# Altium PCB Presgo.PcbDoc
Units mm, origin at the board's own origin, x right, y up, seen from the top; angles counter-clockwise.
Board outline 35 x 25 mm, 4 copper layers (Top Layer, GND1, GND2, Bottom Layer), stack 0.672 mm thick; 38 components, 29 nets, 144 pads, 70 vias.
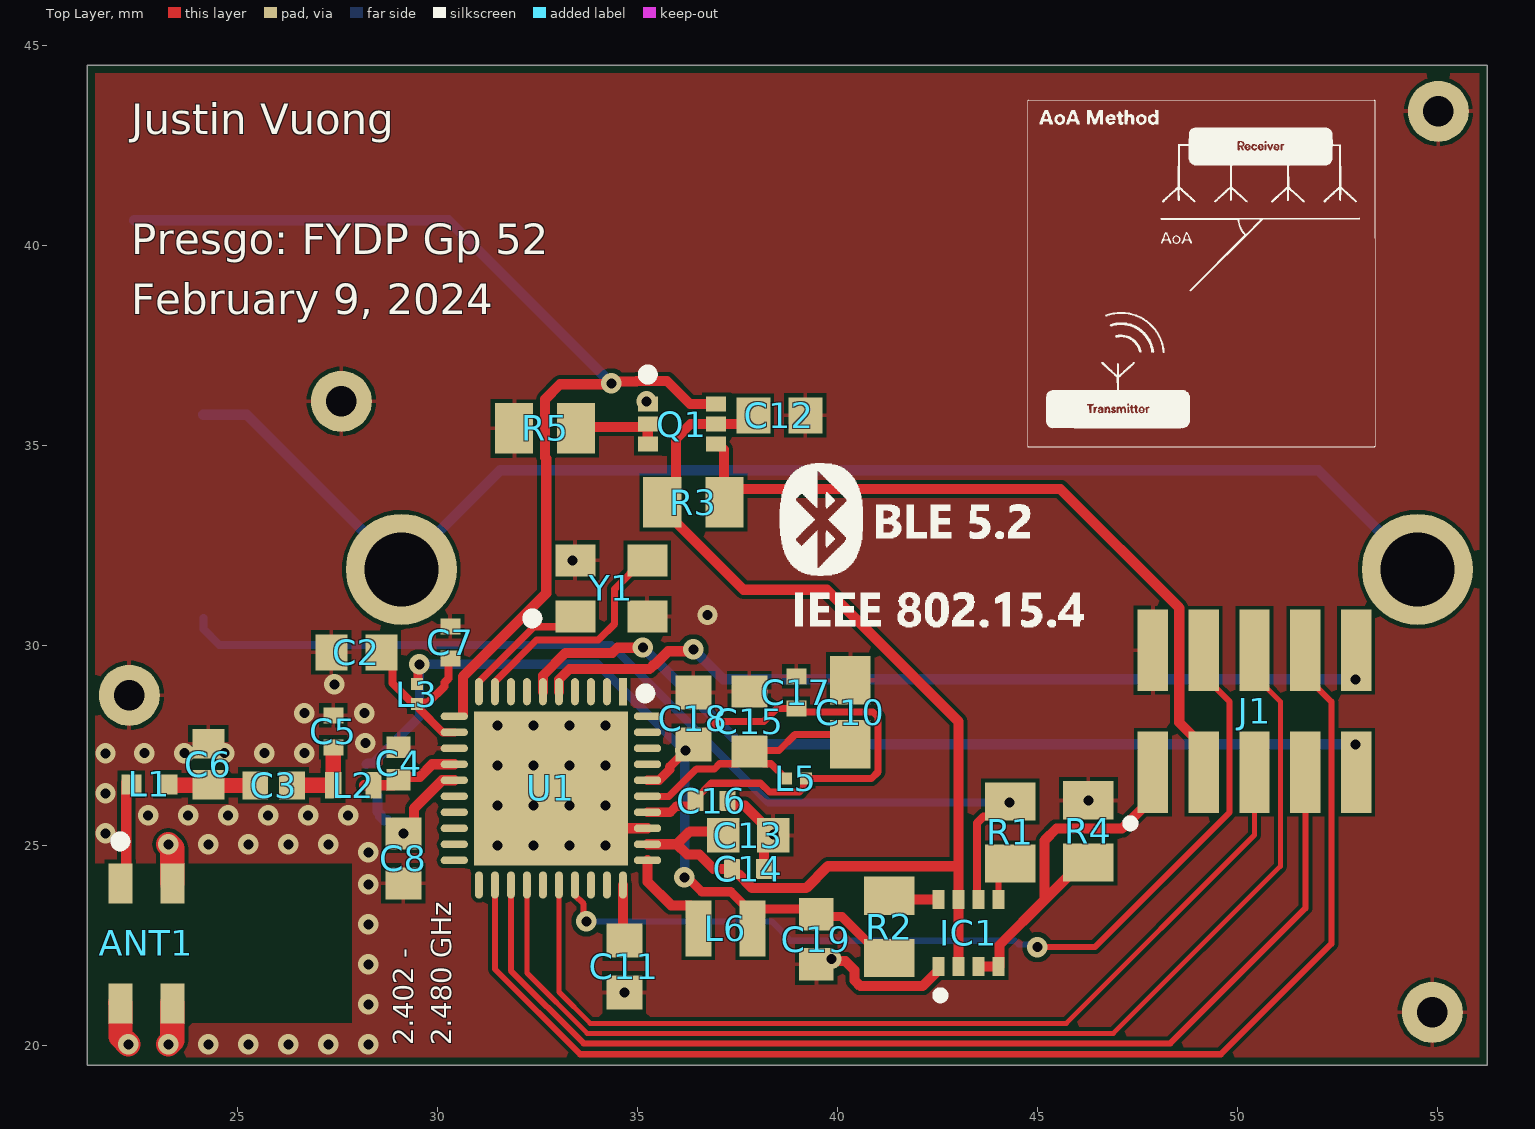
[diagram p0: Top Layer view]
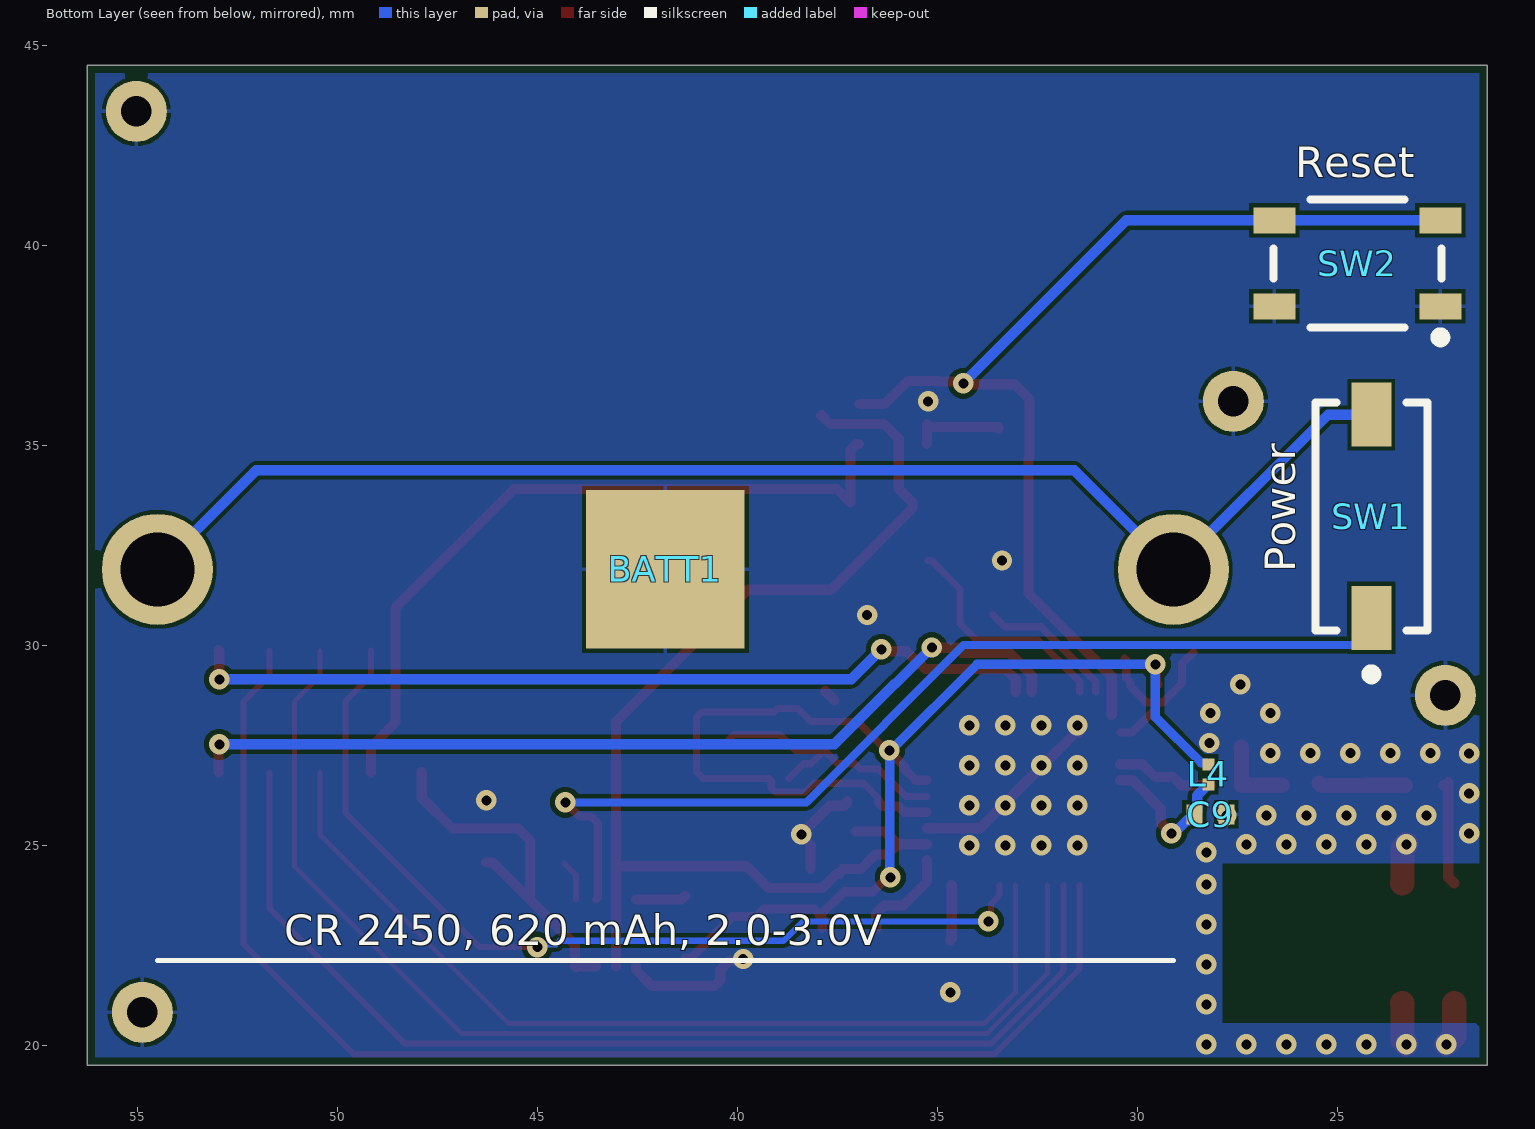
[diagram p1: Bottom Layer view, seen from below]
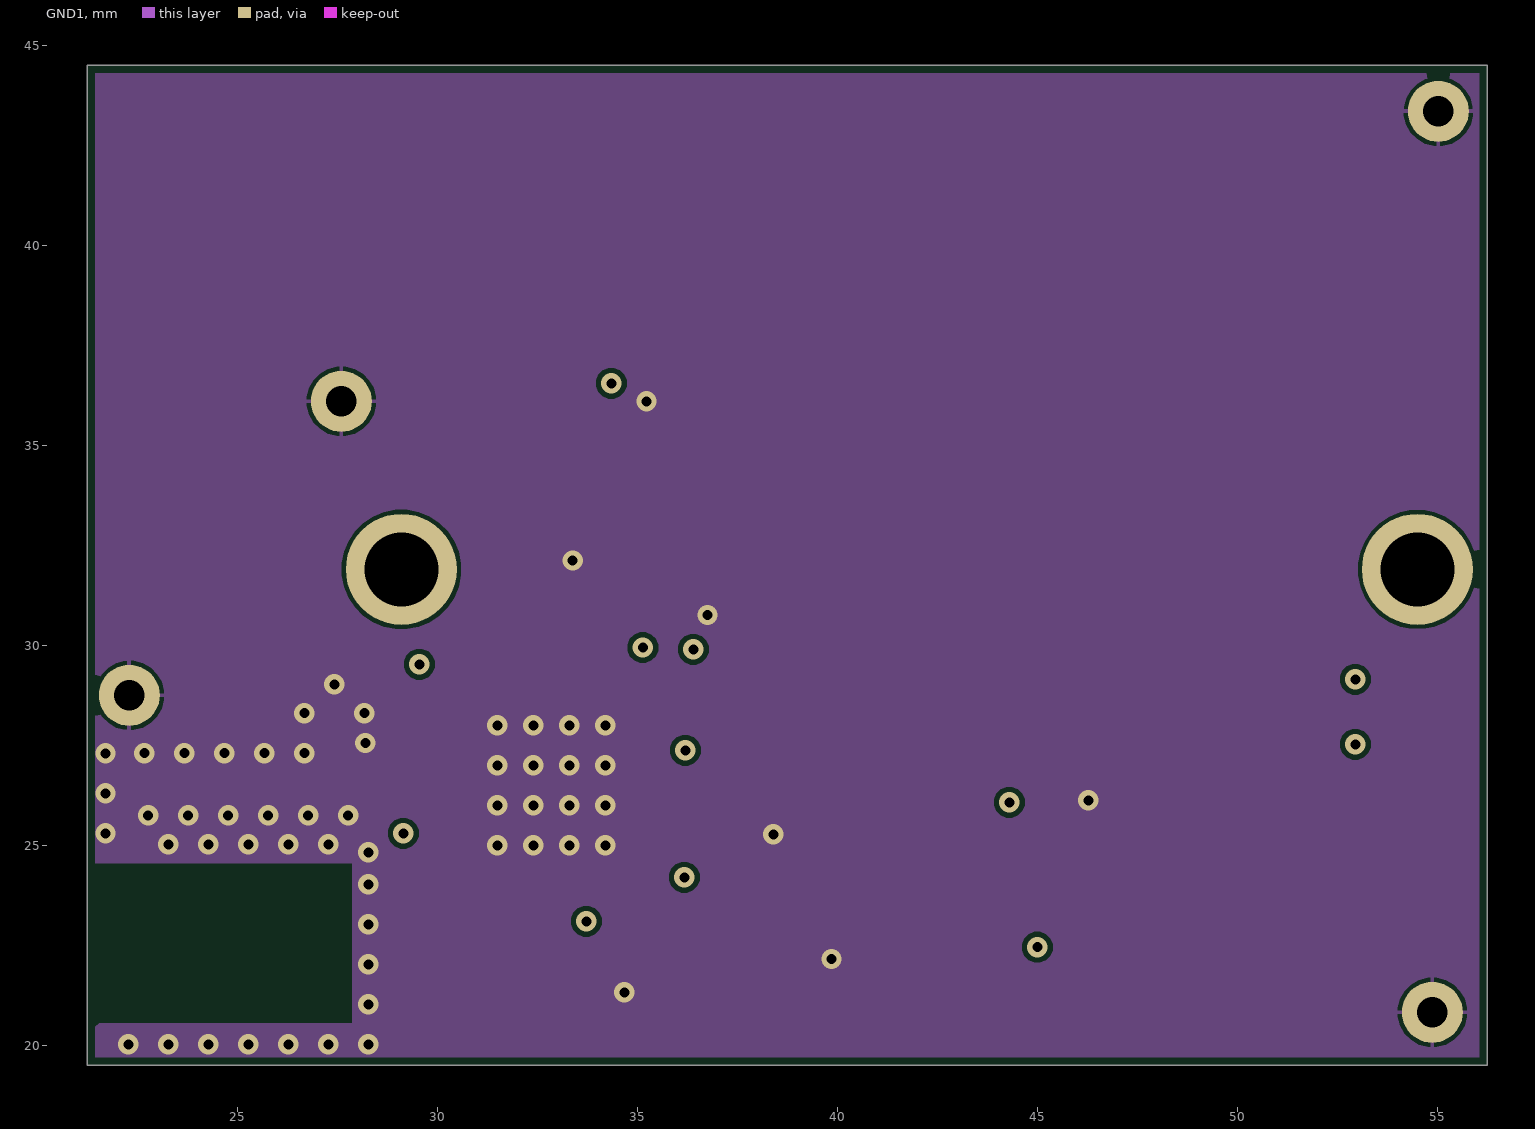
[diagram p2: GND1]
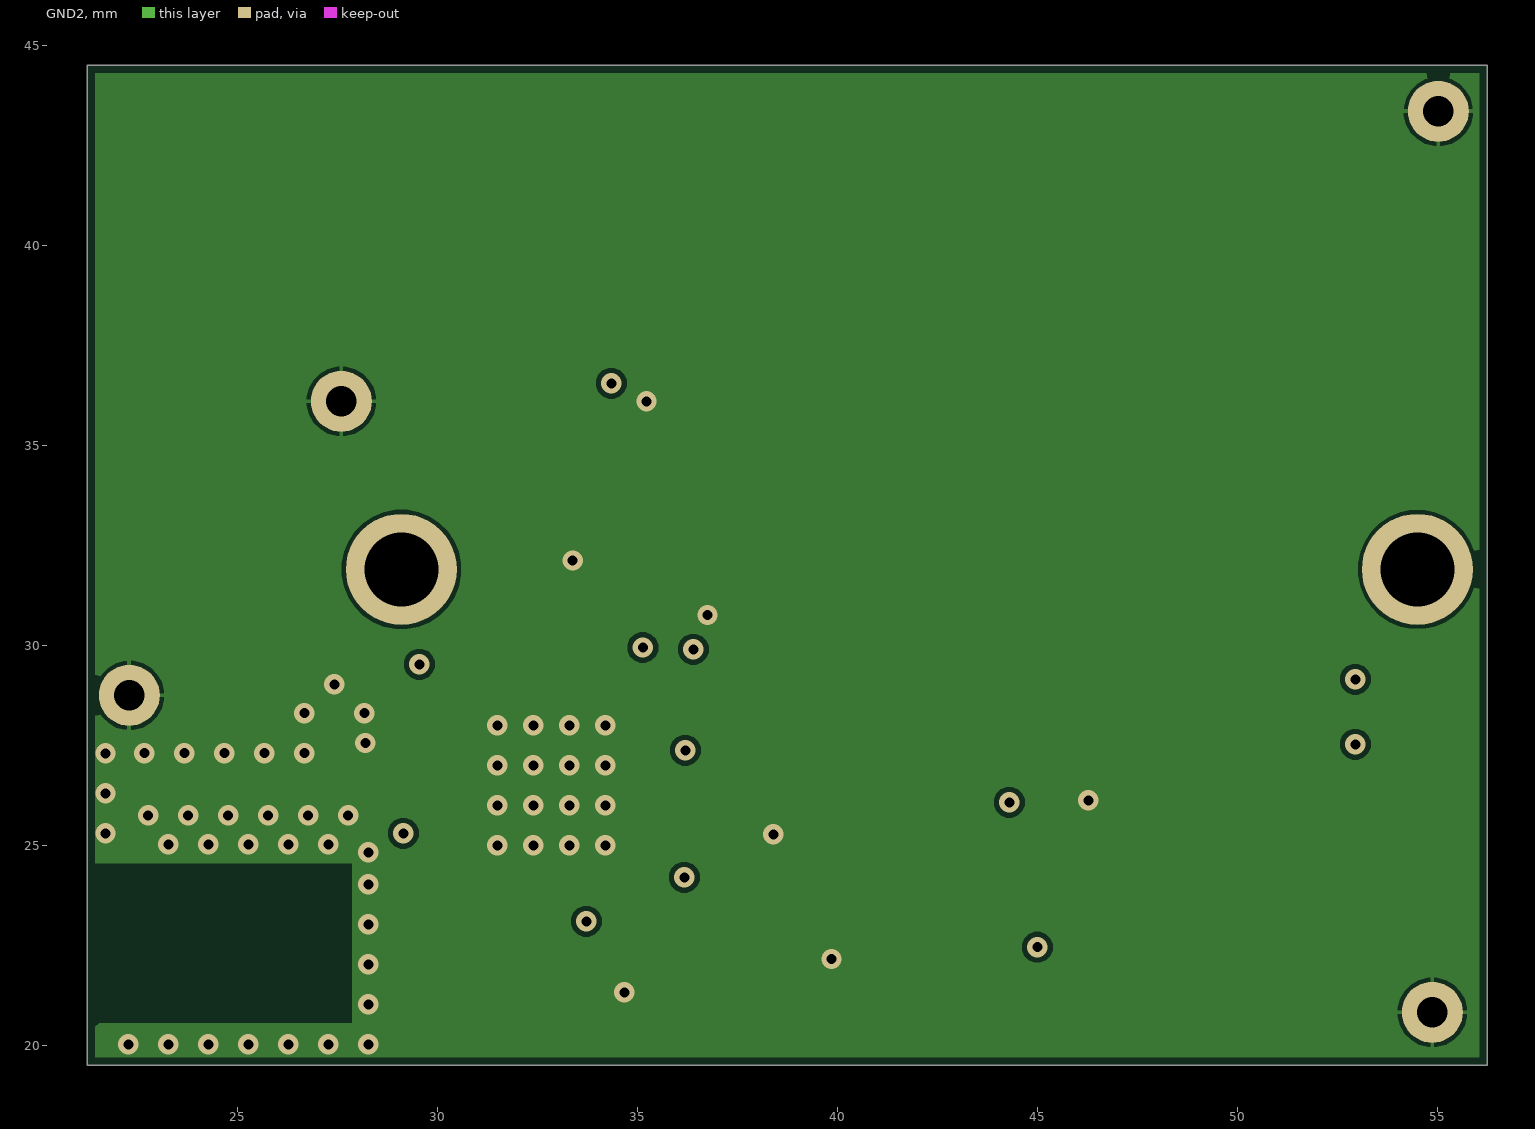
[diagram p3: GND2]
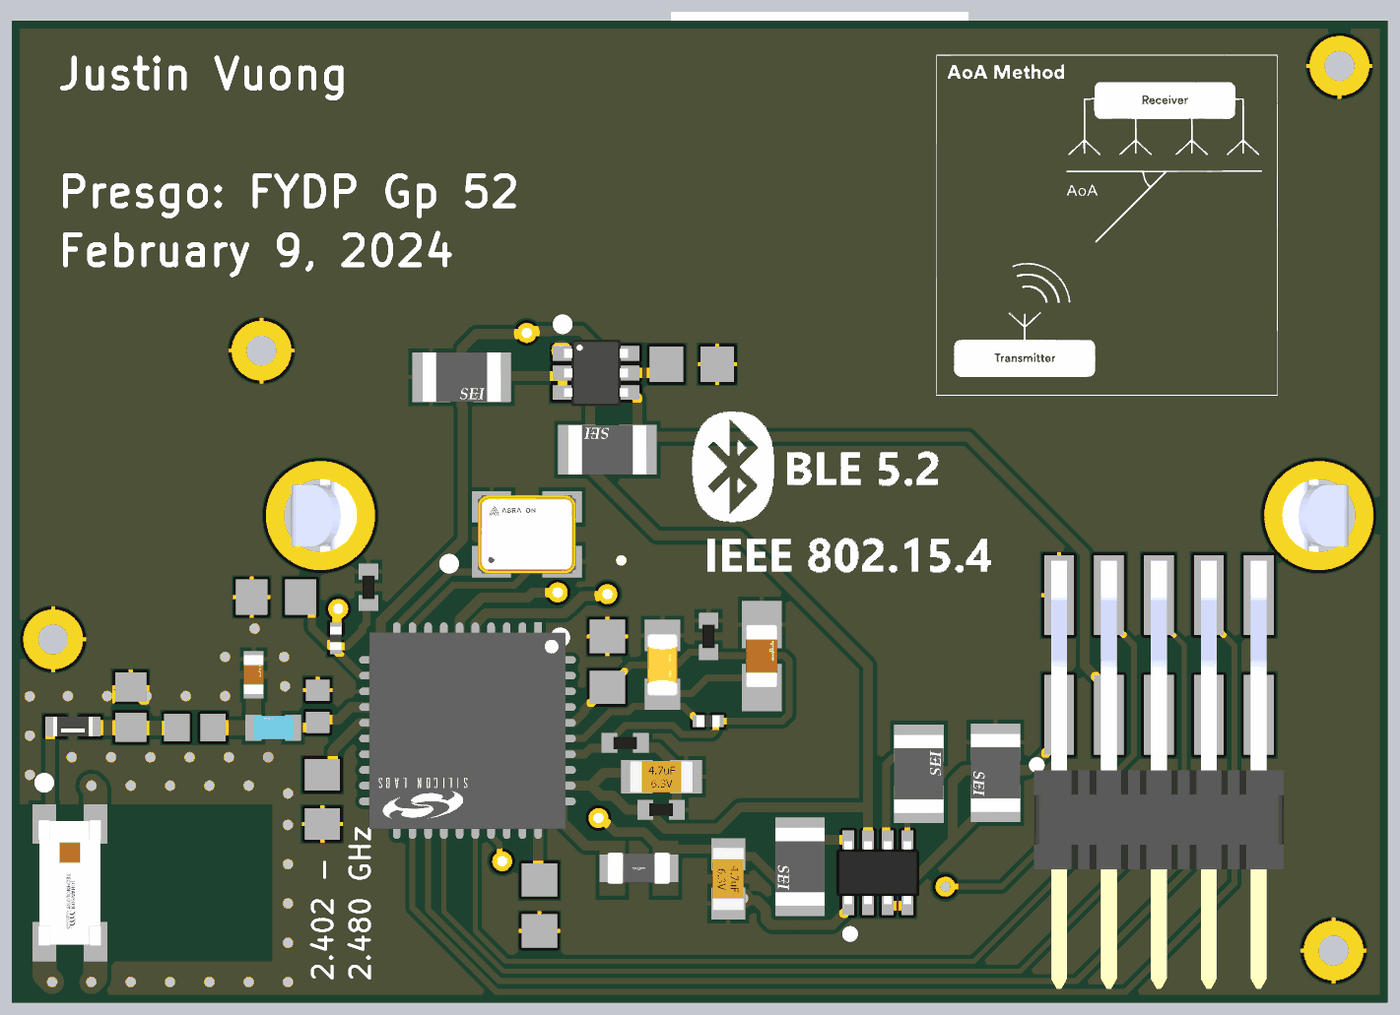
[diagram p4: 3D render of the assembled board from above, using the file's embedded part models]
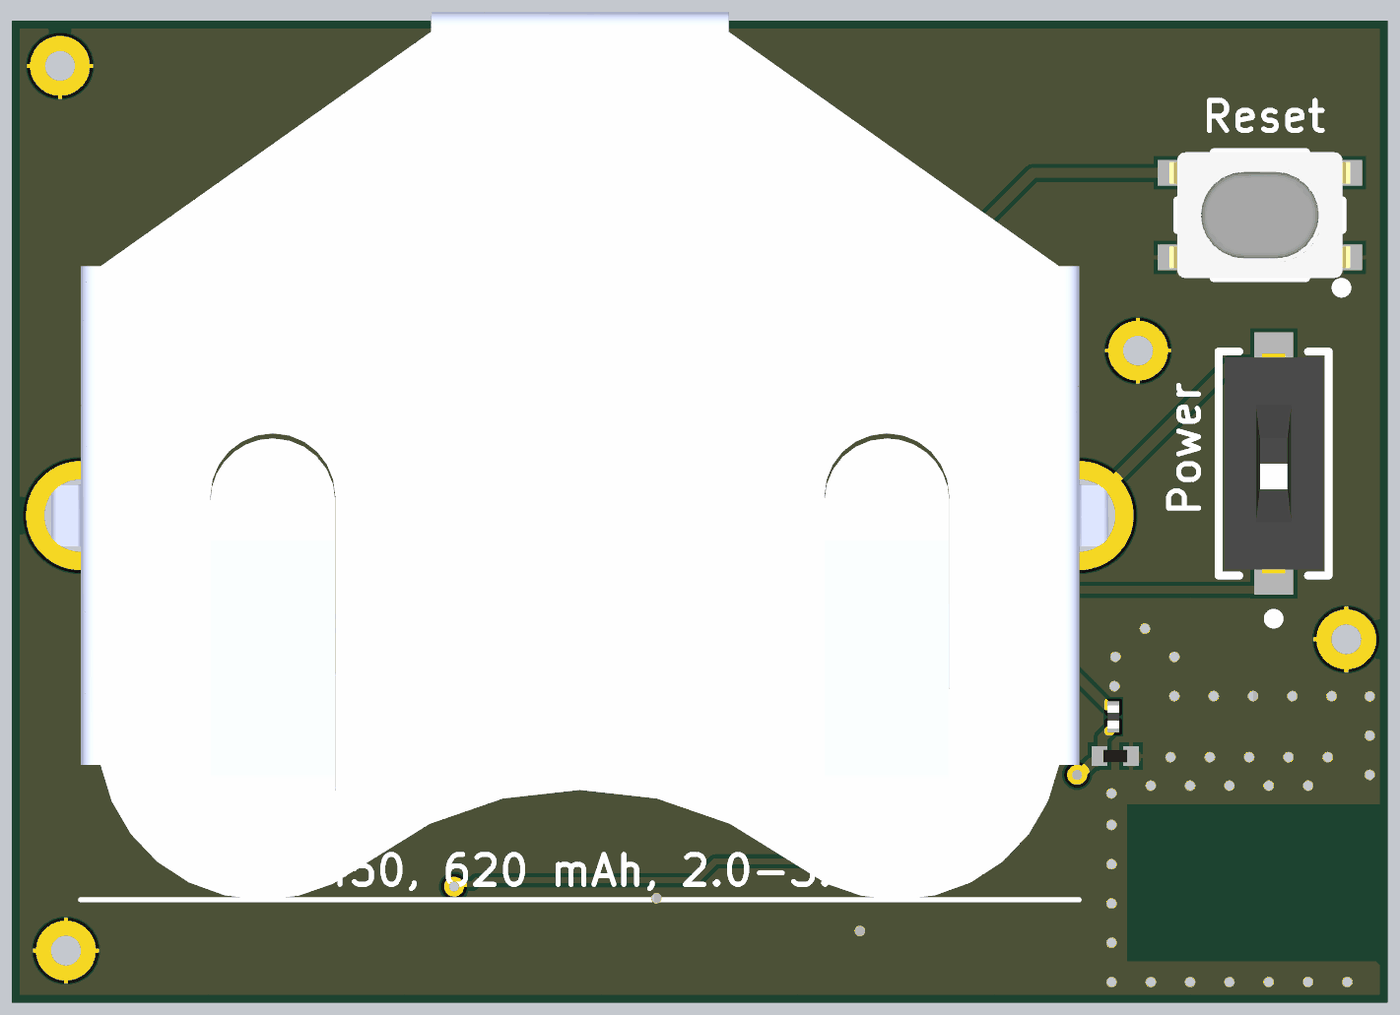
[diagram p5: 3D render of the assembled board from below, using the file's embedded part models]

## Layer stack, top to bottom
Top Solder: solder mask 0.0102, Solder Resist, Dk 3.5
Top Layer: signal copper 0.035
Dielectric 2: prepreg 0.0711, PP-006, Dk 4.1
GND1: signal copper 0.07
Dielectric 1: core 0.32, FR-4, Dk 4.8
GND2: signal copper 0.07
Dielectric 3: prepreg 0.0711, PP-006, Dk 4.1
Bottom Layer: signal copper 0.035
Bottom Solder: solder mask 0.0102, Solder Resist, Dk 3.5

## Board outline
21.25,19.5 21.25,44.5 56.25,44.5 56.25,19.5

## Design rules (kind name [scope] priority, off if disabled: settings)
BoardOutlineClearance [All] p1: gap=0.2 ignorepadtopadclearanceinfootprint=FALSE
Clearance [All] p1: gap=0.102 ignorepadtopadclearanceinfootprint=FALSE except(0.127: Arc-Via Track-Via SMDPad-Via THPad-Via Via-Via Via-Fill Via-Poly Via-Region Via-Text; 0.25: Arc-Hole Track-Hole SMDPad-Hole THPad-Hole Via-Hole Fill-Hole Poly-Hole Region-Hole Text-Hole)
Clearance ClearanceMidLayer1 [OnLayer('Mid Layer 1') Or IsVia Or IsThruPin vs OnLayer('Mid Layer 1')] p2: gap=0.102 ignorepadtopadclearanceinfootprint=FALSE except(0.127: Arc-Via Track-Via SMDPad-Via THPad-Via Via-Via Via-Fill Via-Poly Via-Region Via-Text; 0.25: Arc-Hole Track-Hole SMDPad-Hole THPad-Hole Via-Hole Fill-Hole Poly-Hole Region-Hole Text-Hole)
Clearance ClearanceTopLayer [OnLayer('Top Layer') Or IsVia Or IsThruPin vs OnLayer('Top Layer') Or IsVia Or IsThruPin] p3: gap=0.203 ignorepadtopadclearanceinfootprint=FALSE except(0.25: Arc-Hole Track-Hole SMDPad-Hole THPad-Hole Via-Hole Fill-Hole Poly-Hole Region-Hole Text-Hole)
Clearance ClearanceBottomLayer [OnLayer('Bottom Layer') Or IsVia Or IsThruPin vs OnLayer('Bottom Layer') Or IsVia Or IsThruPin] p4: gap=0.203 ignorepadtopadclearanceinfootprint=FALSE except(0.25: Arc-Hole Track-Hole SMDPad-Hole THPad-Hole Via-Hole Fill-Hole Poly-Hole Region-Hole Text-Hole)
Clearance ClearanceMidLayer2 [OnLayer('Mid Layer 2') Or IsVia Or IsThruPin vs OnLayer('Mid Layer 2')] p5: gap=0.102 ignorepadtopadclearanceinfootprint=FALSE except(0.127: Arc-Via Track-Via SMDPad-Via THPad-Via Via-Via Via-Fill Via-Poly Via-Region Via-Text; 0.25: Arc-Hole Track-Hole SMDPad-Hole THPad-Hole Via-Hole Fill-Hole Poly-Hole Region-Hole Text-Hole)
ComponentClearance [All] p1: gap=0.102 collisioncheckmode=3 verticalgap=0.102 showdistances=TRUE
DiffPairsRouting [All] p1: maxlimit=0.102 minlimit=0.102 mostfreqgap=0.102 toplayer_minwidth=0.102 toplayer_maxwidth=1816.048 toplayer_prefwidth=0.102 midlayer1_minwidth=0.102 midlayer1_maxwidth=1816.048 midlayer1_prefwidth=0.102 midlayer2_minwidth=0.102 midlayer2_maxwidth=1816.048 midlayer2_prefwidth=0.102 bottomlayer_minwidth=0.102 bottomlayer_maxwidth=1816.048 bottomlayer_prefwidth=0.102 maxuncoupledlength=12.7
Height [All] p1: minheight=0 maxheight=1816.048 prefheight=12.7
HoleSize [All] p1: absolutevalues=TRUE maxlimit=6.3 minlimit=0.2 maxpercent=80.000 minpercent=20.000
HoleToHoleClearance [All] p1: gap=0.25 allowstackedmicrovias=FALSE
MinimumAnnularRing [All] p1: minimumring=0.076
MinimumSolderMaskSliver [All] p1: minsoldermaskwidth=0
PlaneClearance [All] p1: clearance=0.102
PlaneClearance PlaneClearanceMidLayer1 [OnLayer('Mid Layer 1')] p2: clearance=0.102
PlaneClearance PlaneClearanceMidLayer2 [OnLayer('Mid Layer 2')] p3: clearance=0.102
PlaneClearance PlaneClearanceTopLayer [OnLayer('Top Layer')] p4: clearance=0.203
PlaneClearance PlaneClearanceBottomLayer [OnLayer('Bottom Layer')] p5: clearance=0.203
PlaneConnect PlaneConnectPowerPads [InPadClass('PowerPads')] p1: planeconnectstyle=Direct reliefexpansion=0.508 reliefentries=4 reliefconductorwidth=0.254 reliefairgap=0.254
PlaneConnect [All] p2: pad.planeconnectstyle=Relief pad.reliefexpansion=0.3 pad.reliefentries=4 pad.reliefconductorwidth=0.102 pad.reliefairgap=0.102 via.planeconnectstyle=Direct via.reliefexpansion=0.3 via.reliefentries=4 via.reliefconductorwidth=0.127 via.reliefairgap=0.127
PlaneConnect PlaneConnectTopLayer [OnLayer('Top Layer')] p3: pad.planeconnectstyle=Relief pad.reliefexpansion=0.3 pad.reliefentries=4 pad.reliefconductorwidth=0.203 pad.reliefairgap=0.203 via.planeconnectstyle=Direct via.reliefexpansion=0.3 via.reliefentries=4 via.reliefconductorwidth=0.127 via.reliefairgap=0.127
PlaneConnect PlaneConnectBottomLayer [OnLayer('Bottom Layer')] p4: pad.planeconnectstyle=Relief pad.reliefexpansion=0.3 pad.reliefentries=4 pad.reliefconductorwidth=0.203 pad.reliefairgap=0.203 via.planeconnectstyle=Direct via.reliefexpansion=0.3 via.reliefentries=4 via.reliefconductorwidth=0.127 via.reliefairgap=0.127
PlaneConnect PlaneConnectMidLayer1 [OnLayer('Mid Layer 1')] p5: pad.planeconnectstyle=Relief pad.reliefexpansion=0.3 pad.reliefentries=4 pad.reliefconductorwidth=0.102 pad.reliefairgap=0.102 via.planeconnectstyle=Direct via.reliefexpansion=0.3 via.reliefentries=4 via.reliefconductorwidth=0.127 via.reliefairgap=0.127
PlaneConnect PlaneConnectMidLayer2 [OnLayer('Mid Layer 2')] p6: pad.planeconnectstyle=Relief pad.reliefexpansion=0.3 pad.reliefentries=4 pad.reliefconductorwidth=0.102 pad.reliefairgap=0.102 via.planeconnectstyle=Direct via.reliefexpansion=0.3 via.reliefentries=4 via.reliefconductorwidth=0.127 via.reliefairgap=0.127
PolygonConnect PolygonConnectMidLayer1 [OnLayer('Mid Layer 1') vs OnLayer('Mid Layer 1')] p1: thpad.connectstyle=Relief thpad.reliefconductorwidth=0.102 thpad.reliefentries=4 thpad.polygonreliefangle="90 Angle" thpad.airgapwidth=0.102 smdpad.connectstyle=Relief smdpad.reliefconductorwidth=0.102 smdpad.reliefentries=4 smdpad.polygonreliefangle="90 Angle" smdpad.airgapwidth=0.102 via.connectstyle=Direct via.reliefconductorwidth=0.127 via.reliefentries=4 via.polygonreliefangle="90 Angle" via.airgapwidth=0.127
PolygonConnect [All] p2: thpad.connectstyle=Relief thpad.reliefconductorwidth=0.102 thpad.reliefentries=4 thpad.polygonreliefangle="90 Angle" thpad.airgapwidth=0.102 smdpad.connectstyle=Relief smdpad.reliefconductorwidth=0.102 smdpad.reliefentries=4 smdpad.polygonreliefangle="90 Angle" smdpad.airgapwidth=0.102 via.connectstyle=Direct via.reliefconductorwidth=0.127 via.reliefentries=4 via.polygonreliefangle="90 Angle" via.airgapwidth=0.127
PolygonConnect PolygonConnectMidLayer2 [OnLayer('Mid Layer 2') vs OnLayer('Mid Layer 2')] p3: thpad.connectstyle=Relief thpad.reliefconductorwidth=0.102 thpad.reliefentries=4 thpad.polygonreliefangle="90 Angle" thpad.airgapwidth=0.102 smdpad.connectstyle=Relief smdpad.reliefconductorwidth=0.102 smdpad.reliefentries=4 smdpad.polygonreliefangle="90 Angle" smdpad.airgapwidth=0.102 via.connectstyle=Direct via.reliefconductorwidth=0.127 via.reliefentries=4 via.polygonreliefangle="90 Angle" via.airgapwidth=0.127
PolygonConnect PolygonConnectTopLayer [OnLayer('Top Layer') vs OnLayer('Top Layer')] p4: thpad.connectstyle=Relief thpad.reliefconductorwidth=0.203 thpad.reliefentries=4 thpad.polygonreliefangle="90 Angle" thpad.airgapwidth=0.203 smdpad.connectstyle=Relief smdpad.reliefconductorwidth=0.203 smdpad.reliefentries=4 smdpad.polygonreliefangle="90 Angle" smdpad.airgapwidth=0.203 via.connectstyle=Direct via.reliefconductorwidth=0.127 via.reliefentries=4 via.polygonreliefangle="90 Angle" via.airgapwidth=0.127
PolygonConnect PolygonConnectPowerPads [All vs (InPadClass('PowerPads'))] p5: connectstyle=Direct reliefconductorwidth=0.254 reliefentries=4 polygonreliefangle="90 Angle" airgapwidth=0.254
PolygonConnect PolygonConnectBottomLayer [OnLayer('Bottom Layer') vs OnLayer('Bottom Layer')] p6: thpad.connectstyle=Relief thpad.reliefconductorwidth=0.203 thpad.reliefentries=4 thpad.polygonreliefangle="90 Angle" thpad.airgapwidth=0.203 smdpad.connectstyle=Relief smdpad.reliefconductorwidth=0.203 smdpad.reliefentries=4 smdpad.polygonreliefangle="90 Angle" smdpad.airgapwidth=0.203 via.connectstyle=Direct via.reliefconductorwidth=0.127 via.reliefentries=4 via.polygonreliefangle="90 Angle" via.airgapwidth=0.127
RoutingVias [All] p1: holewidth=0.2 width=0.45 viastyle="Through Hole" minholewidth=0.2 minwidth=0.45 maxholewidth=6.3 maxwidth=6.55
RoutingVias RoutingVias_GND [InNet('GND')] p2: holewidth=0.25 width=0.508 viastyle="Through Hole" minholewidth=0.25 minwidth=0.508 maxholewidth=0.25 maxwidth=0.508
SilkToSilkClearance [All] p1: silktosilkclearance=0
SilkToSolderMaskClearance [IsPad] p1: minsilkscreentomaskgap=0.102 clearancetoexposedcopper=TRUE
SolderMaskExpansion SolderMaskExpansion_Via [(IsVia AND InNet('GND'))] p1: expansion=0.075 istentingtop=TRUE soldermaskfromhole=TRUE
SolderMaskExpansion [All] p2: expansion=0.075 istentingtop=FALSE
SolderMaskExpansion SolderMaskExpansion_1 [All] p3: expansion=0.102 istentingtop=FALSE
Width [All] p1: maxlimit=1816.048 minlimit=0.102 preferedwidth=0.102
20 further rules are at their usual default settings.

## Classes and differential pairs
component class Processor: ANT1 C2 C3 C4 C5 C6 C7 C8 C9 C10 C11 C12 C13 C14 C15 C16 C17 C18 C19 L1 L2 L3 L4 L5 L6 U1 Y1
component class Connector: BATT1 IC1 J1 Q1 R1 R2 R3 R4 R5 SW1 SW2

## Components (designator, comment, footprint, x,y, rotation, side; value= is the part's Value field where it differs from the comment)
ANT1 "2450AT18D0100E" FP-2450AT18D0100E-MFG 22.725,22.55 r270 top
BATT1 "3009" BAT_3009 41.8,31.9 r180 bottom
C2 "C0603C121J5GACAUTO" CAPC1608X87X35LL15T15 27.975,29.825 r180 top
C3 "0402ZK180GBSTR" CAPC1006X50X20NL10T10 25.908,26.5 r180 top
C4 "04023J1R2BBSTR" CAPC1006X50X20LL10T10 29.032,27.046 r270 top
C5 "GJM1555C1H1R3BB01D" FP-GJM155-0_05-MFG 27.4,27.85 r90 top
C6 "04023J1R5PBSTR" CAPC1006X50X20ML10T10 24.275,27.025 r270 top
C7 "GRM155R71C104KA88D" FP-GRM15-MFG 30.325,30.075 r270 top value=0.10μF
C8 "C0603C121J5GACAUTO" CAPC1608X87X35LL15T15 29.15,24.675 r270 top
C9 "GRM155R71C104KA88D" FP-GRM15-MFG 28.175,25.775 r0 bottom value=0.10μF
C10 "GRM188R60J106ME47D" FP-GRM188-0_1-e0_2_0_55-IPC_A 40.325,28.325 r90 top
C11 "C0603C105K9PACTU" CAPC1608X90X35LL15T15 34.675,21.975 r90 top
C12 "C0603C105K9PACTU" CAPC1608X90X35LL15T15 38.55,35.75 r180 top
C13 "CL10B475KQ8NQNC" FP-CL10-IPC_C 37.775,25.25 r0 top value=4.7uF
C14 "GRM155R71C104KA88D" FP-GRM15-MFG 37.77,24.409 r180 top value=0.10μF
C15 "CC0603KRX7R9BB103" FP-CC0603-DA-MFG 37.8,28.1 r90 top value="10 nF"
C16 "GRM155R71C104KA88D" FP-GRM15-MFG 36.855,26.111 r180 top value=0.10μF
C17 "GRM155R71C104KA88D" FP-GRM15-MFG 38.975,28.825 r270 top value=0.10μF
C18 "C0603C105K9PACTU" CAPC1608X90X35LL15T15 36.4,28.175 r270 top
C19 "CL10B475KQ8NQNC" FP-CL10-IPC_C 39.475,22.65 r270 top value=4.7uF
IC1 "TPS2117DRLR" SOTFL50P160X60-8N 43.283,22.809 r90 top
J1 "FTSH-105-01-F-DH" SimplicityStudio 50.43,28.35 r180 top
L1 "744901015" WE-TCI_0402 22.8,26.525 r180 top
L2 "LQW15AN2N6G8ZD" FP-LQW15AN_80-MFG 27.9,26.5 r180 top
L3 "742692004" "WE-TMSB 0201" 29.489,28.778 r270 top
L4 "742692004" "WE-TMSB 0201" 28.225,26.775 r270 bottom
L5 "742692004" "WE-TMSB 0201" 38.964,26.67 r180 top
L6 "LQM18PZ2R2MFHD" FP-LQM18PZ_FH-MFG 37.2,22.925 r180 top
Q1 "DMC2400UV-7" DIOD-SOT563-6_V 36.111,35.533 r0 top
R1 "RMCF0805FT100K" FP-RMCF0805-IPC_C 44.324,25.323 r90 top
R2 "RMCF0805FT100K" FP-RMCF0805-IPC_C 41.301,22.961 r270 top
R3 "RMCF0805FT100K" FP-RMCF0805-IPC_C 36.4,33.575 r180 top
R4 "RMCF0805FT100K" FP-RMCF0805-IPC_C 46.275,25.35 r270 top
R5 "RMCF0805FT100K" FP-RMCF0805-IPC_C 32.695,35.425 r0 top
SW1 "CHS-01TA" FP-CHS-01TA-MFG 24.15,33.225 r90 bottom
SW2 "PTS810SJM250SMTRLFS" FP-PTS810SJM250SMTRLFS-MFG 24.5,39.55 r0 bottom
U1 "EFR32BG22C224F512IM40-C" FP-EFR32BG22C224F512IM40-IPC_C 32.841,26.425 r270 top
Y1 "ABM10-165-38.400MHZ-T3" FP-ABM10-165-MFG 34.35,31.425 r0 top

## Footprints (in the part's own frame and the unit in brackets; to place one, negate y for a bottom-side part, rotate by r counter-clockwise, add the part's x,y. Pads: shape width x height; smd on the part's side, far side on the other; paste and mask are expansions set on the pad)
BAT_3009 [mm]
  rect 3.96x3.96 smd paste-3: N(0,0)
  round 2.775 hole 1.85: P1(-12.7,0) P2(12.7,0)
  silkscreen extent -12.7,-9.78 12.7,-9.78, body extent -13.45,-9.78 13.45,12.83, height 5.84
CAPC1006X50X20LL10T10 [mm] "Chip Capacitor, 2-Leads, Body 1.00x0.55mm, IPC High Density"
  rect 0.54x0.6 smd: 1(-0.41,0) 2(0.41,0)
  body extent -0.55,-0.33 0.55,0.33, height 0.5
CAPC1006X50X20ML10T10 [mm] "Chip Capacitor, 2-Leads, Body 1.00x0.55mm, IPC Low Density"
  rect 0.74x0.8 smd: 1(-0.51,0) 2(0.51,0)
  body extent -0.55,-0.33 0.55,0.32, height 0.5
CAPC1006X50X20NL10T10 [mm] "Chip Capacitor, 2-Leads, Body 1.00x0.55mm, IPC Medium Density"
  rect 0.64x0.7 smd: 1(-0.46,0) 2(0.46,0)
  body extent -0.55,-0.33 0.55,0.32, height 0.5
CAPC1608X87X35LL15T15 [mm] "Chip Capacitor, 2-Leads, Body 1.60x0.80mm, IPC High Density"
  rect 0.8x0.9 smd: 1(-0.625,0) 2(0.625,0)
  body extent -0.87,-0.48 0.87,0.48, height 0.87
CAPC1608X90X35LL15T15 [mm] "Chip Capacitor, 2-Leads, Body 1.60x0.81mm, IPC High Density"
  rect 0.85x0.9 smd: 1(-0.65,0) 2(0.65,0)
  body extent -0.88,-0.48 0.87,0.48, height 0.9
DIOD-SOT563-6_V [mm] "SOTFL, 6-Leads, Body 1.7x1.25mm, Pitch 0.5mm"
  rect 0.5x0.375 smd: 1(-0.85,0.5) 2(-0.85,0) 3(-0.85,-0.5) 4(0.85,-0.5) 5(0.85,0) 6(0.85,0.5)
  silkscreen extent -0.97,1.11 -0.72,1.36, body extent -0.81,-0.85 0.81,0.85, height 0.6
FP-2450AT18D0100E-MFG [mm]
  rect 1x0.6 smd paste+0 mask+0: 1(-1.5,-0.65) 2(1.5,-0.65) 3(1.5,0.65) 4(-1.5,0.65)
  silkscreen extent -2.67,-0.77 -2.43,-0.53, body extent -1.6,-0.8 1.6,0.8, height 1.3
FP-ABM10-165-MFG [mm]
  rect 1x0.8 smd paste+0 mask+0: 1(-0.9,-0.7) 2(0.9,-0.7) 3(0.9,0.7) 4(-0.9,0.7)
  silkscreen extent -2.1,-0.87 -1.85,-0.63, body extent -1.5,-1.2 1.5,1.2, height 0.25
FP-CC0603-DA-MFG [mm]
  rect 0.8x0.9 smd paste+0 mask+0: 1(-0.75,0) 2(0.75,0)
  body extent -1.35,-0.75 1.35,0.75, height 0.25
FP-CHS-01TA-MFG [mm]
  rect 1.6x1 smd paste+0 mask+0: 1(-2.54,0) 2(2.54,0)
  silkscreen extent -4.07,-1.4 2.85,1.4, body extent -2.8,-1.25 2.8,1.25, height 2.5
FP-CL10-IPC_C [mm]
  rect 0.806x0.858 smd paste+0 mask+0: 1(-0.626,0) 2(0.626,0)
  body extent -1.13,-0.58 1.13,0.58, height 0.25
FP-EFR32BG22C224F512IM40-IPC_C [mm]
  rect 0.681x0.192 smd paste+0 mask+0: 1(-2.416,1.8)
  rrect100% 0.681x0.192 smd paste+0 mask+0: 2(-2.416,1.4) 3(-2.416,1) 4(-2.416,0.6) 5(-2.416,0.2) 6(-2.416,-0.2) 7(-2.416,-0.6) 8(-2.416,-1) 9(-2.416,-1.4) 10(-2.416,-1.8) 21(2.416,-1.8) 22(2.416,-1.4) 23(2.416,-1) 24(2.416,-0.6) 25(2.416,-0.2) 26(2.416,0.2) 27(2.416,0.6) 28(2.416,1) 29(2.416,1.4) 30(2.416,1.8)
  rrect100% 0.192x0.681 smd paste+0 mask+0: 11(-1.8,-2.416) 12(-1.4,-2.416) 13(-1,-2.416) 14(-0.6,-2.416) 15(-0.2,-2.416) 16(0.2,-2.416) 17(0.6,-2.416) 18(1,-2.416) 19(1.4,-2.416) 20(1.8,-2.416) 31(1.8,2.416) 32(1.4,2.416) 33(1,2.416) 34(0.6,2.416) 35(0.2,2.416) 36(-0.2,2.416) 37(-0.6,2.416) 38(-1,2.416) 39(-1.4,2.416) 40(-1.8,2.416)
  rect 3.85x3.85 smd paste-1000 mask+0: 41(0,0)
  silkscreen extent -2.5,2.23 -2.25,2.48, body extent -2.86,-2.86 2.86,2.86, height 0.25
FP-GJM155-0_05-MFG [mm]
  rect 0.4x0.5 smd paste+0 mask+0: 1(-0.4,0) 2(0.4,0)
  body extent -0.7,-0.38 0.7,0.38, height 0.25
FP-GRM15-MFG [mm]
  rect 0.4x0.5 smd paste+0 mask+0: 1(-0.4,0) 2(0.4,0)
  body extent -0.7,-0.38 0.7,0.38, height 0.25
FP-GRM188-0_1-e0_2_0_55-IPC_A [mm]
  rect 1.208x1.012 smd paste+0 mask+0: 1(-0.802,0) 2(0.802,0)
  body extent -1.91,-1.01 1.91,1.01, height 0.25
FP-LQM18PZ_FH-MFG [mm]
  rect 0.65x1.4 smd paste-1000 mask-1000: 1(-0.675,0) 2(0.675,0)
  body extent -1.1,-0.8 1.1,0.8, height 0.25
FP-LQW15AN_80-MFG [mm]
  rect 0.41x0.66 smd paste+0 mask+0: 1(-0.505,0) 2(0.505,0)
  body extent -0.81,-0.45 0.81,0.45, height 0.25
FP-PTS810SJM250SMTRLFS-MFG [mm]
  rect 1.05x0.65 smd paste+0 mask+0: 1(-2.075,1.075) 2(2.075,1.075) 3(-2.075,-1.075) 4(2.075,-1.075)
  silkscreen extent -2.2,-1.6 2.1,1.97, body extent -2.3,-1.6 2.3,1.6, height 2.7
FP-RMCF0805-IPC_C [mm]
  rect 0.955x1.262 smd paste+0 mask+0: 1(-0.776,0) 2(0.776,0)
  body extent -1.35,-0.77 1.35,0.77, height 0.25
SimplicityStudio [mm]
  rect 0.76x2.03 smd: 01(2.54,1.525) 02(2.54,-1.525) 03(1.27,1.525) 04(1.27,-1.525) 05(0,1.525) 06(0,-1.525) 07(-1.27,1.525) 08(-1.27,-1.525) 09(-2.54,1.525) 10(-2.54,-1.525)
  silkscreen extent 3.01,2.7 3.2,2.9, body extent -3.18,-2.4 3.18,8.5, height 3.44
SOTFL50P160X60-8N [mm]
  rect 0.475x0.3 smd: 1(-0.838,0.75) 2(-0.838,0.25) 3(-0.838,-0.25) 4(-0.838,-0.75) 5(0.838,-0.75) 6(0.838,-0.25) 7(0.838,0.25) 8(0.838,0.75)
  body extent -0.8,-1.05 0.8,1.05, height 0.6
WE-TCI_0402 [mm] "Thinfilm Chip Inductor, 2-leads, body 1.00x0.50mm"
  rect 0.5x0.5 smd: 1(-0.45,0) 2(0.45,0)
  body extent -0.5,-0.25 0.5,0.25, height 0.32
"WE-TMSB 0201" [mm] "Chip Inductor, 2-Leads, Body 0.6x0.3mm, IPC Medium Density"
  rect 0.3x0.3 smd: 1(-0.25,0) 2(0.25,0)
  body extent -0.3,-0.15 0.3,0.15, height 0.28

## Part data
ANT1: library part CMP-2000-05543-2, "RF ANT 2.4GHZ CHIP SOLDER SMD", Case/Package=SMD/SMT, Frequency=2.45GHz, Max Power Dissipation=2W, Package Quantity=3000, Bandwidth=100MHz, Gain=-1dB, Height=0.047inch, Impedance=50R, Length=3.2mm, Mount="Surface Mount", Number of Bands=1, Packaging="Tape and Reel", Power Rating=2W, Radiation Hardening=No, Return Loss=-10dB, RoHS Compliant=Yes, SERIES=-, Termination=Solder, Width=1.6mm
BATT1: library part CMP-010-000000-2, "CR2450 Retainer", Package=None, Availability=Unavailable, Battery=CR2450, Component Type=Standard, Design Item ID=3009, MP=3009, Pin Count=3, Price=None, Source=3009.SchLib
C2 C8: library part CMP-2006-03534-1, Capacitance=120pF, Manufacturer=Kemet, Part Number=C0603C121J5GACAUTO
C3: library part CMP-2008-04842-1, Capacitance=18pF, Manufacturer="AVX Interconnect / Elco", Part Number=0402ZK180GBSTR
C4: library part CMP-2008-04752-1, Capacitance=1.2pF, Manufacturer="AVX Interconnect / Elco", Part Number=04023J1R2BBSTR
C5: library part CMP-2008-03816-2, "Multi-Layer Ceramic Capacitor 1.3pF C0G  ±0.1pF 0402 Paper T/R", Capacitance=1.3pF, Case Code (Imperial)=0402, Case Code (Metric)=1005, Dielectric=C0G, Max Operating Temperature=125°C, Min Operating Temperature=-55°C, Package Quantity=1, Voltage Rating=50V, Case/Package=0402, Construction=Flat, Depth=0.5mm, Height=0.5mm, Lead Free="Lead Free", Lead Pitch=0.3mm, Length=1mm, Mount="Surface Mount", Number of Pins=2, Packaging="Tape and Reel", Radiation Hardening=No, REACH SVHC="No SVHC", SERIES=GJM, Termination=SMD/SMT, Thickness=0.022inch, Voltage Rating (DC)=50V, Width=0.02inch
C6: library part CMP-2008-04763-1, Capacitance=1.5pF, Manufacturer="AVX Interconnect / Elco", Part Number=04023J1R5PBSTR
C7 C9 C14 C16 C17: library part CMP-2100-03641-2, "CAP CER 0.1UF 16V X7R 0402", Capacitance=0.10μF, Manufacturer=Murata, Package=GRM15, Temperature="-55°C to +125°C", Temperature Characteristic=X7R, Temperature Range High=+125°C, Temperature Range Low=-55°C, Tolerance=10%, Voltage Rating=16Vdc, Category=Cap, ComponentLink2Description=Datasheet, ComponentLink2URL=https://search.murata.co.jp/Ceramy/image/img/A01X/G101/ENG/GRM155R71H471KA01-01A.pdf, Device Class L1="Passive Components", Device Class L2=Capacitors, Device Class L3="Ceramic Capacitors", Digikey Description="CAP CER 0.1UF 16V X7R 0402", Height=0.55mm, Ipc Land Pattern Name=CAPC10050X219, Lead Free=yes, Manufacturer Part Number=GRM155R71C104KA88D, Material=Ceramic, Mouser Description="0402 0.1 uF 16V ±10 % Tolerance X7R SMT Multilayer Ceramic Capacitor", Octopart=https://octopart.com/grm155r71c104ka88d-murata-196880, RoHS=TRUE, Standoff Height=0mm
C10: library part CMP-2006-02792-2, "Chip Multilayer Ceramic Capacitors for General Purpose, 0603, 10uF, X5R, 15%, 20%, 6.3V", Capacitance=10uF, Case Code (Imperial)=0603, Case Code (Metric)=1608, Dielectric=X5R, Max Operating Temperature=85°C, Min Operating Temperature=-55°C, Package Quantity=4000, Tolerance=20%, VOLTAGE=6.3V, Case/Package=0603, Depth=0.8mm, Height=0.8mm, Lead Free="Lead Free", Length=1.6mm, Material=Ceramic, Mount="Surface Mount", Packaging="Tape and Reel", Radiation Hardening=No, REACH SVHC="No SVHC", Termination=SMD/SMT, Thickness=0.035inch, Voltage Rating=6.3V, Voltage Rating (DC)=6.3V, Width=0.031inch
C11 C12 C18: library part CMP-2006-02241-1, Capacitance=1uF, Manufacturer=Kemet, Part Number=C0603C105K9PACTU
C13 C19: library part CMP-2000-06096-2, "CAP CER 4.7UF 6.3V X7R 0603", Capacitance=4.7uF, Manufacturer=Samsung, Package=CL10, Temperature="-55°C to +125°C", Temperature Characteristic=X7R, Temperature Coefficient=15%, Temperature Range High=+125°C, Temperature Range Low=-55°C, Tolerance=10%, Voltage Rating=6.3V, Automotive=No, Category=Cap, ComponentLink2Description=Datasheet, ComponentLink2URL=http://www.samsungsem.com/kr/support/product-search/mlcc/__icsFiles/afieldfile/2018/07/24/CL10B475KQ8NQNC.pdf, Device Class L1="Passive Components", Device Class L2=Capacitors, Device Class L3="Ceramic Capacitors", Digikey Description="CAP CER 4.7UF 6.3V X7R 0603", Height=0.95mm, Ipc Land Pattern Name=CAPC16080X80, Lead Free=Yes, Manufacturer Part Number=CL10B475KQ8NQNC, Material=Ceramic, Mouser Description="C Series 0402 4.7 uF 6.3 V ±20 % Tolerance X5R SMT Multilayer Ceramic Capacitor", Octopart=https://octopart.com/cl10b475kq8nqnc-samsung-24957976, RoHS=TRUE
C15: library part CMP-2100-03600-2, "CAP CER 10000PF 50V X7R 0603", Capacitance="10 nF", Manufacturer=YAGEO, Package=CC0603-DA, Temperature="-55°C to +125°C", Temperature Characteristic=X7R, Temperature Coefficient=15%, Temperature Range High=+125°C, Temperature Range Low=-55°C, Tolerance=0.1, VOLTAGE="50 V", Automotive=No, Category=Cap, ComponentLink2Description=Datasheet, ComponentLink2URL=http://www.yageo.com/documents/recent/UPY-GPHC_X7R_6.3V-to-50V_18.pdf, Device Class L1="Passive Components", Device Class L2=Capacitors, Device Class L3="Ceramic Capacitors", Digikey Description="CAP CER 10000PF 50V X7R 0603", Footprint Url=http://www.yageo.com/exep/pages/download/literatures/UPY-C_GEN_24.pdf, Height=0.9mm, Lead Free=Yes, Manufacturer Part Number=CC0603KRX7R9BB103, Material=Ceramic, Mouser Description="Multilayer Ceramic Capacitor, CC Series, 0.01 - F, - 10%, X7R, 50 V, 0603 [1608 Metric]", Octopart=https://octopart.com/cc0603krx7r9bb103-yageo-192938, RoHS=TRUE, Voltage Rating="50 V"
IC1: "Integrated Circuit", Manufacturer_Name="Texas Instruments", Mouser Part Number=595-TPS2117DRLR, Datasheet Link=https://www.ti.com/lit/ds/symlink/tps2117.pdf?ts=1704705133749&ref_url=https%253A%252F%252Fwww.ti.com%252Fproduct%252FTPS2117, Height=0.6mm, Manufacturer_Part_Number=TPS2117DRLR, Mouser Price/Stock=https://www.mouser.co.uk/ProductDetail/Texas-Instruments/TPS2117DRLR?qs=HoCaDK9Nz5c%2FKe5lpCPPWQ%3D%3D
J1: library part SimplicityStudio
L1: library part CMP-03913-14415873-1, "744901015 Fixed Ind 1.5NH 700MA 200MOHM Sm", Case Code (Imperial)=0402, Case Code (Metric)=1005, Current Rating=700mA, DC Resistance (DCR)=140mΩ, Inductance=1.5nH, Max Operating Temperature=125°C, Min Operating Temperature=-40°C, Self Resonant Frequency=10GHz, Test Frequency=500MHz, Case/Package=0402, Composition="Thin Film", Core Material=Alumina, Height=320µm, Height - Seated (Max)=406.4µm, Length=1mm, Max DC Current=700mA, Mount="Surface Mount", NexarPartId=14415873, Number of Pins=2, Packaging=Digi-Reel®, Q Factor=13, REACH SVHC=Unknown, RoHS=Compliant, Shielding=Unshielded, Termination=SMD/SMT, Weight=652.039032µg, Width=500µm
L2: library part CMP-06042-008265-1, "Wire Wound RF Inductor for Automotive 2.6nH ±2% 1950mA 0.035Ω 0402 (1005)", Inductance=2.6nH
L3 L4 L5: library part CMP-1490-00003-1, "Tiny Multilayer Suppression  Bead  WE-TMSB, Z= 240 Ohm", Manufacturer="Wuerth Elektronik", ComponentLink1Description="Manufacturer URL", ComponentLink1URL=http://www.we-online.com, ComponentLink2Description=Datasheet, ComponentLink2URL=http://www.we-online.de/katalog/media/pdf/742692004.pdf, Impedance="240 Ohm", PackageReference="WE-TMSB 0201", PartNumber=742692004
L6: library part CMP-06042-017061-1, "FIXED IND 2.2UH 700MA 470MOHM SM", Case Code (Imperial)=1008, Case Code (Metric)=2520, Case/Package=0603, Current Rating=700mA, DC Resistance (DCR)=470mR, Inductance=2.2uH, Max Operating Temperature=125°C, Min Operating Temperature=-55°C, Ratings=AEC-Q200, Resistor Type="Thin Film", Saturation Current=300mA, Self Resonant Frequency=80MHz, Test Frequency=1MHz, Tolerance=20%, Core Material=Ferrite, Mount="Surface Mount", Packaging="Cut Tape", RoHS Compliant=Yes, Shielding=Shielded
Q1: library part CMP-2000-06168-1, "Complementary Pair Enhancement Mode MOSFET, 20 V N-Channel, -20 V P-Channel, -55 to 150 degC, 6-Pin SOTFL (SOT563), RoHS, Tape and Reel", Manufacturer="Diodes Inc", Maximum Continuous Drain Current=0.7A,1A, Maximum Drain Source Resistance=1.5Ω, Maximum Drain Source Voltage=20V, Maximum Gate Source Voltage=±12(Q1)V,±8(Q2)V, Maximum Gate Threshold Voltage=1V, Maximum Operating Temperature=+150°C, Maximum Power Dissipation=1W, Minimum Operating Temperature=-55°C, Package Description="6-Pin Small Outline Transistor, Flat Lead, Body 1.175 x 1.6 mm, Pitch 0.5 mm", Package Reference=SOT563-6, Package Type=SOT-563, Typical Input Capacitance @ Vds=37.1pF@10V, Category=PowerMOSFET, Channel Mode=Enhancement, Channel Type=N,P, Datasheet URL=http://www.diodes.com/_files/datasheets/DMC2400UV.pdf, Datasheet Version="Rev. 7-2, 06/2013", Dimensions=1.7x1.25x0.6mm, Height=0.6mm, Length=1.7mm, Manufacturer URL=http://www.diodes.com/, Mounting Technology=SurfaceMount, Mounting Type=SurfaceMount, Number of Elements per Chip=2, Pin Count=6, Transistor Configuration=Isolated, Transistor Material=Si, Typical Gate Charge @ Vgs=0.5nC@4.5V, Typical Turn-Off Delay Time=13.74ns, Typical Turn-On Delay Time=4.06ns, Width=1.25mm
R1 R2 R3 R4 R5: library part CMP-26527-001446-1, "100kΩ ±1% 0.125W 0805 Thick Film Chip Resistor AEC-Q200 compliant", Case Code (Imperial)=0805, Case Code (Metric)=2012, Max Operating Temperature=155°C, Max Power Dissipation=125mW, Min Operating Temperature=-55°C, Resistance=100kR, Resistor Type="Thick Film", Temperature Coefficient=100ppm/°C, Tolerance=1%, Working Voltage=150V, Case/Package=0805, Construction=Rectangular, Contact Plating=Tin, Depth=1.25mm, Features="Automotive AEC-Q200", Height=0.026inch, Lead Free="Lead Free", Length=2mm, Military Standard=Not, Mount="Surface Mount", Number of Terminations=2, Packaging="Tape and Reel", Power Rating=125mW, Radiation Hardening=No, RoHS Compliant=Yes, SERIES=RMCF, Technology="THICK FILM", Width=0.049inch
SW1: library part CMP-71740-000003-1, "SWITCH SLIDE DIP SPST 100MA 6V", Contact Current Rating=100mA, Contact Resistance=50mΩ, Manufacturer="Nidec Copal Electronics", Temperature="-40°C to +85°C", Temperature Range High=+85°C, Temperature Range Low=-40°C, Voltage Rating Dc=6V, Automotive=No, Category=Switch, ComponentLink2Description=Datasheet, ComponentLink2URL=https://www.nidec-copal-electronics.com/e/catalog/switch/chs.pdf, Device Class L1=Electromechanical, Device Class L2=Switches, Device Class L3="DIP Switches", Digikey Description="SWITCH SLIDE DIP SPST 100MA 6V", Electromechanical Life=2000Cycles, Height=2.5mm, Lead Free=Yes, Manufacturer Part Number=CHS-01TA, Mount="Surface Mount", Number Of Circuits=1, Octopart=https://octopart.com/chs-01ta-nidec+copal-52304644, Package=CHS-01TA, RoHS=TRUE, Standoff Height=0mm, Throw Configuration=SPST
SW2: library part CMP-10040-000001-2, "SWITCH TACTILE SPST-NO 0.05A 16V", Case/Package=SMD/SMT, Color=Black, Current Rating=50mA, Max Operating Temperature=85°C, Min Operating Temperature=-40°C, Operating Force=160gf, Package Quantity=2900, Voltage Rating (DC)=16V, Actuator Type=Standard, Contact Plating=Silver, Depth=4.6mm, Illumination Type=Non-Illuminated, Lead Free="Lead Free", Length=3.2mm, Max Current Rating=50mA, Mechanical Life=150000Cycles, Mount="Surface Mount", Orientation=Straight, Packaging="Tape and Reel", RoHS Compliant=Yes, Switch Function=Off-Mom, Switch Travel=0.15mm, Termination=J-Bend, Throw Configuration=SPST
U1: library part CMP-08140-000035-1, "BLUE GECKO, QFN40, SECURE BOOT W", RoHS Compliant=Yes
Y1: library part CMP-27762-010013-1, "CRYSTAL 38.4000MHZ 10PF SMD", Case/Package=SMD/SMT, ESR (Equivalent Series Resistance)=40R, Frequency=38.4MHz, Frequency Stability=20ppm, Load Capacitance=10pF, Max Operating Temperature=85°C, Min Operating Temperature=-30°C, Height=0.02inch, Length=0.098inch, Mount="Surface Mount", Packaging="Tape and Reel", RoHS Compliant=Yes, Width=0.079inch

## Free pads (board coordinates)
  round 1.524 hole 0.762: 4(22.3,28.75) 4(27.6,36.1) 4(54.875,20.825) 4(55.025,43.35)

## Via types
v1: diameter 0.508, hole 0.25, Top Layer to Bottom Layer, tented both sides, 58 vias
v2: diameter 0.508, hole 0.25, Top Layer to Bottom Layer, 12 vias

## Nets (pads, with @x,y where several pads share a name; then routed paths per layer and width w, separated by ;. In a path a pad name is that pad's centre, name@x,y a point inside that pad or via, vN(x,y) a via of type N, cw(c..) or ccw(c..) an arc to the next point about the centre after c; other vN are vias at no path point)
A_VDD: C10.1 C15.1 L5.2 U1.35 | length 7
  Top Layer w0.178: U1.35 35.791,26.225 36.475,26.91 36.929,26.91 37.058,27.039 37.489,27.039 C15.1 C15.1@37.824,27.374 ; L5.2 38.345,27.039 38.158,27.039 C15.1@37.824,27.374 ; C10.1 40.082,27.766 38.937,27.766 38.545,27.374 C15.1@37.824,27.374
DCDC: C16.2 C17.2 C18.2 C19.1 L3.1 L4.1 L5.1 L6.1 R2.2 U1.34 U1.36 | length 35.2
  Top Layer w0.178: v2(36.2,27.375) 36.275,27.375 37,28.1 38.169,28.1 38.494,28.425 C17.2 39.068,28.332 40.896,28.332 41.022,28.206 41.022,26.84 40.852,26.67 L5.1 39.152,26.609 39.152,26.434 39.048,26.33 38.305,26.33 38.082,26.552 36.846,26.552 36.455,26.161 C16.2
  Top Layer w0.229: L3.1 29.52,29.059 29.52,29.495 v2(29.551,29.526) ; U1.34 35.822,25.825 35.972,25.976 36.37,25.976 36.455,26.061 C16.2 ; U1.36 35.542,26.625 35.812,26.896 35.812,26.962 36.2,27.35 v2(36.2,27.375) ; v2(36.175,24.2) 36.251,24.2 36.61,23.841 37.334,23.841 L6.1@37.875,23.3 ; L6.1 37.875,23.174 37.938,23.237 37.938,23.262 38.086,23.409 39.342,23.409 39.531,23.22 40.113,23.22 41.148,22.185 R2.2
  Bottom Layer w0.229: L4.1 28.261,27.061 28.405,27.061 29.551,28.207 v2(29.551,29.526) 34.006,29.526 v2@36.158,27.375 ; v2@36.188,24.213 36.188,27.363 v2(36.2,27.375)
GND: ANT1.2 ANT1.3 ANT1.4 BATT1.N C2.2 C4.1 C5.2 C6.1 C7.1 C8.2 C9.1 C10.2 C11.1 C12.1 C13.2 C14.1 C15.2 C16.1 C17.1 C18.1 C19.2 IC1.1 J1.02 pad.4 Q1.1 R4.1 R5.1 SW2.1 SW2.2 U1.13 U1.33 U1.41 Y1.2 Y1.4 | length 14.5
  Top Layer w0.102: v1(33.383,32.12) 33.438,32.175 Y1.4@33.625,32.175
  Top Layer w0.254: U1.41@31.471,27.813 31.547,27.813 32.41,26.949 33.299,26.06 33.935,25.425 U1.33 ; v1(35.23,36.102) 35.23,36.064 Q1.1 ; C16.1 37.255,26.061 37.328,25.988 37.689,25.988 v1(38.401,25.276) C13.2 38.17,25.019 C14.1 ; C15.2@37.575,28.625 C15.2 ; v1(39.854,22.157) 39.902,22.109 40.196,22.109 40.428,21.877 40.428,21.627 40.576,21.479 42.129,21.479 42.533,21.883 IC1.1
  Top Layer w0.61: ANT1.2 22.08,21.045 22.08,20.22 v1(22.275,20.025) ; v1(23.275,20.025) 23.37,20.12 23.37,21.045 ANT1.3 ; v1(23.275,25.025) 23.37,24.93 23.37,24.055 ANT1.4
  other v1: 24.275,20.025 25.275,20.025 26.275,20.025 27.275,20.025 28.275,20.025 28.275,21.025 34.675,21.325 28.275,22.025 28.275,23.025 28.275,24.025 28.276,24.826 31.5,25 32.4,25 33.3,25 34.2,25 24.275,25.025 25.275,25.025 26.275,25.025 27.275,25.025 21.705,25.3 22.773,25.75 23.773,25.75 24.773,25.75 25.773,25.75 26.773,25.75 27.773,25.75 31.5,26 32.4,26 33.3,26 34.2,26 46.275,26.126 21.705,26.3 31.5,27 32.4,27 33.3,27 34.2,27 21.705,27.3 22.675,27.305 23.675,27.305 24.675,27.305 25.675,27.305 26.675,27.305 28.2,27.556 31.5,28 32.4,28 33.3,28 34.2,28 26.675,28.305 28.175,28.305 27.425,29.025 36.754,30.759
MCU_PWR: C12.2 C13.1 C14.2 IC1.2 IC1.7 Q1.5 R3.2 U1.32 | length 29.3
  Top Layer w0.254: U1.32 35.989,25.025 ; C13.1@37.05,25.349 36.314,25.349 35.989,25.025 ; C14.2 36.909,24.409 36.55,24.769 36.246,24.769 35.989,25.025 ; C14.2@37.443,24.286 37.52,24.286 37.875,23.931 39.219,23.931 39.764,24.475 43.033,24.475 ; C12.2 37.683,35.533 Q1.5 36.33,35.533 35.965,35.168 35.965,33.916 R3.2 35.624,33.421 37.655,31.391 39.734,31.391 43.033,28.092 43.033,24.475 ; IC1.2 IC1.7 43.033,24.475
NetANT1_1: ANT1.1 L1.2 | length 2.7
  Top Layer w0.254: ANT1.1 22.225,24.2 22.225,26.5 22.225,26.579 22.304,26.5 L1.2@22.35,26.5
NetBATT1_P1: BATT1.P1 BATT1.P2 SW1.2 | length 34
  Bottom Layer w0.254: SW1.2 25.235,35.765 BATT1.P2 31.575,34.375 52.025,34.375 BATT1.P1
NetC3_1: C3.1 C5.1 L2.2 | length 2
  Top Layer w0.381: C3.1 L2.2 27.398,26.502 27.398,27.448 C5.1
NetC3_2: C3.2 C6.2 L1.1 | length 2.2
  Top Layer w0.381: L1.1@23.3,26.5 24.271,26.5 24.279,26.493 24.282,26.493 24.286,26.496 25.396,26.496 C3.2@25.45,26.55
NetC11_2: C11.2 U1.30 | length 1.4
  Top Layer w0.254: U1.30 34.641,22.659 C11.2
NetIC1_5: IC1.5 R1.1 | length 1
  Top Layer w0.152: IC1.5 44.033,24.256 R1.1
NetIC1_8: IC1.8 R2.1 | length 1.3
  Top Layer w0.254: R2.1 41.392,23.647 IC1.8
NetJ1_04: J1.04 U1.27 | length 23.1
  Top Layer w0.152: U1.27 33.441,23.754 33.657,23.538 33.657,23.168 v2(33.725,23.1) ; v2(45,22.454) 46.435,22.454 49.8,25.819 49.8,28.6 49.16,29.24 J1.04
  Bottom Layer w0.152: v2(33.725,23.1) 38.355,23.1 38.841,22.615 44.441,22.615 44.534,22.522 44.932,22.522 v2(45,22.454)
NetJ1_05: J1.05 U1.26 | length 23.9
  Top Layer w0.127: U1.26 33.041,21.331 33.822,20.55 45.725,20.55 50.43,25.255 J1.05
NetJ1_06: J1.06 U1.24 | length 29.1
  Top Layer w0.127: U1.24 32.241,21.808 33.749,20.3 46.9,20.3 51.075,24.475 51.075,28.595 50.43,29.24 J1.06
NetJ1_07: J1.07 U1.23 | length 27.6
  Top Layer w0.152: U1.23 31.841,21.867 33.657,20.05 48.325,20.05 51.7,23.425 J1.07
NetJ1_08: J1.08 U1.22 | length 32.6
  Top Layer w0.152: U1.22 31.441,21.908 33.572,19.776 49.59,19.776 52.35,22.536 52.35,28.59 51.7,29.24 J1.08
NetJ1_09: J1.09 U1.6 | length 22.7
  Top Layer w0.254: U1.6 32.641,29.247 33.205,29.812 34.375,29.812 34.502,29.939 35.132,29.939 v2(35.137,29.944) ; v2(52.95,27.525) 52.97,27.505 J1.09
  Bottom Layer w0.254: v2(35.137,29.944) 36.032,29.049 36.051,29.049 37.575,27.525 v2(52.95,27.525)
NetJ1_10: J1.10 U1.5 | length 21.6
  Top Layer w0.254: U1.5 33.041,29.144 33.306,29.41 35.308,29.41 35.422,29.523 35.446,29.523 35.775,29.851 36.351,29.851 v2(36.4,29.9) ; v2(52.95,29.15) 52.95,29.855 J1.10
  Bottom Layer w0.254: v2(36.4,29.9) 37.15,29.15 v2(52.95,29.15)
NetQ1_2: Q1.2 Q1.3 R5.2 | length 2.3
  Top Layer w0.254: R5.2 33.471,35.457 Q1.2@35.261,35.457 ; Q1.3 Q1.2
NetQ1_6: Q1.6 SW2.3 SW2.4 U1.11 | length 27.1
  Top Layer w0.254: U1.11@30.639,28.256 30.639,29.215 32.721,31.298 32.721,34.673 32.695,34.699 32.695,36.151 33.069,36.525 34.325,36.525 34.399,36.599 34.975,36.599 34.986,36.61 35.741,36.61 36.317,36.033 Q1.6
  Bottom Layer w0.254: SW2.3 SW2.4 30.275,40.625 v2(34.35,36.55)
NetU1_9: U1.9 Y1.3 | length 5.8
  Top Layer w0.178: U1.9 31.441,29.089 31.554,29.202 31.554,29.204 32.479,30.129 34.024,30.129 34.434,30.539 34.434,31.409 35.15,32.125 Y1.3
NetU1_10: U1.10 Y1.1 | length 3.5
  Top Layer w0.178: U1.10 31.041,29.089 31.154,29.202 31.154,29.204 32.414,30.464 33.314,30.464 Y1.1@33.625,30.775
PA_VDD: C8.1 C9.2 L4.2 U1.15 | length 3.7
  Top Layer w0.254: C8.1@29.2,25.3 v2(29.15,25.3) 29.413,25.563 29.413,25.918 30.121,26.625 U1.15
  Bottom Layer w0.254: L4.2@28.248,26.502 28.502,26.248 28.502,25.848 C9.2 28.575,25.725 28.675,25.625 28.756,25.625 29.081,25.3 v2(29.15,25.3)
RF: C4.2 L2.1 U1.14 | length 2.5
  Top Layer w0.254: 28.175,26.5 28.177,26.502 28.898,26.502 29.105,26.709 29.559,26.709 29.875,27.025 U1.14
RF_VDD: C2.1 C7.2 L3.2 U1.12 | length 4.5
  Top Layer w0.203: C2.1 28.88,29.545 28.88,29.051 29.354,28.577 29.441,28.577 L3.2 ; L3.2@29.532,28.571 29.771,28.571 30.175,28.975 30.175,29.069 30.277,29.17 30.277,29.627 C7.2 ; L3.2@29.538,28.48 29.538,28.422 30.135,27.825 U1.12
V_REGSW: L6.2 U1.31 | length 2.5
  Top Layer w0.254: U1.31 35.256,24.086 35.844,23.498 36.327,23.498 36.525,23.3 L6.2
VBATT: IC1.6 R1.2 SW1.1 | length 25.2
  Top Layer w0.203: IC1.6 43.49,23.69 43.49,25.562 43.652,25.723 43.948,25.723 R1.2
  Bottom Layer w0.203: SW1.1 24.15,30.407 24.548,30.009 34.341,30.009 38.275,26.075 v2(44.3,26.075)
WSTK_nRESET: J1.03 Q1.4 R3.1 | length 18.7
  Top Layer w0.254: Q1.4 37.024,35.033 37.167,34.89 37.167,33.584 R3.1 37.508,33.907 45.576,33.907 48.548,30.936 48.548,28.072 49.16,27.46 J1.03
WSTK_VMCU: IC1.3 IC1.4 J1.01 R4.2 | length 9.4
  Top Layer w0.254: IC1.3 IC1.4 ; IC1.4@44.033,21.946 44.056,21.969 44.056,22.509 45.184,23.637 ; R4.2 46.121,24.574 45.184,23.637 ; J1.01 47.89,26.19 47.12,25.42 45.479,25.42 45.184,25.124 45.184,23.637
pads on no net: U1.1 U1.2 U1.3 U1.4 U1.7 U1.8 U1.16 U1.17 U1.18 U1.19 U1.20 U1.21 U1.25 U1.28 U1.29 U1.37 U1.38 U1.39 U1.40

## Polygon pours and split planes (outlines as drawn)
GND on GND2 "GND_L03_P001" (solid, pour order 1): 21.25,19.5 21.25,44.5 56.25,44.5 56.25,19.5
GND on GND1 "GND_L02_P002" (solid, pour order 2): 21.25,19.5 21.25,44.5 56.25,44.5 56.25,19.5
GND on Top Layer "GND_L01_P003" (solid, pour order 3): 21.25,19.5 56.25,19.5 56.25,44.5 21.25,44.5
GND on Bottom Layer "GND_L04_P004" (solid, pour order 4): 21.25,19.5 56.25,19.5 56.25,44.5 21.25,44.5

## Other copper
Multi-Layer:
  pour cut-out: 21.25,20.55 21.25,24.55 27.875,24.55 27.875,20.55

## Silkscreen, mask and mechanical layers (free items; w line width, h text height)
Top Overlay:
  drawing of 48 lines, arcs and shapes, not listed
  text "Justin Vuong" at 22.352,42.781 h0.76
  text "Presgo: FYDP Gp 52" at 22.352,39.781 h0.76
  text "February 9, 2024" at 22.352,38.281 h0.76
  text "2.402 -" at 29.4,20 h0.5 r90
  text "2.480 GHz" at 30.35,20 h0.5 r90
Bottom Overlay:
  text "Reset" at 26.048,41.702 h0.76
  text "Power" at 26.052,31.827 h0.76 r270
  text "CR 2450, 620 mAh, 2.0-3.0V" at 51.323,22.506 h0.76